# Allegro board production_board1_rev4.brd
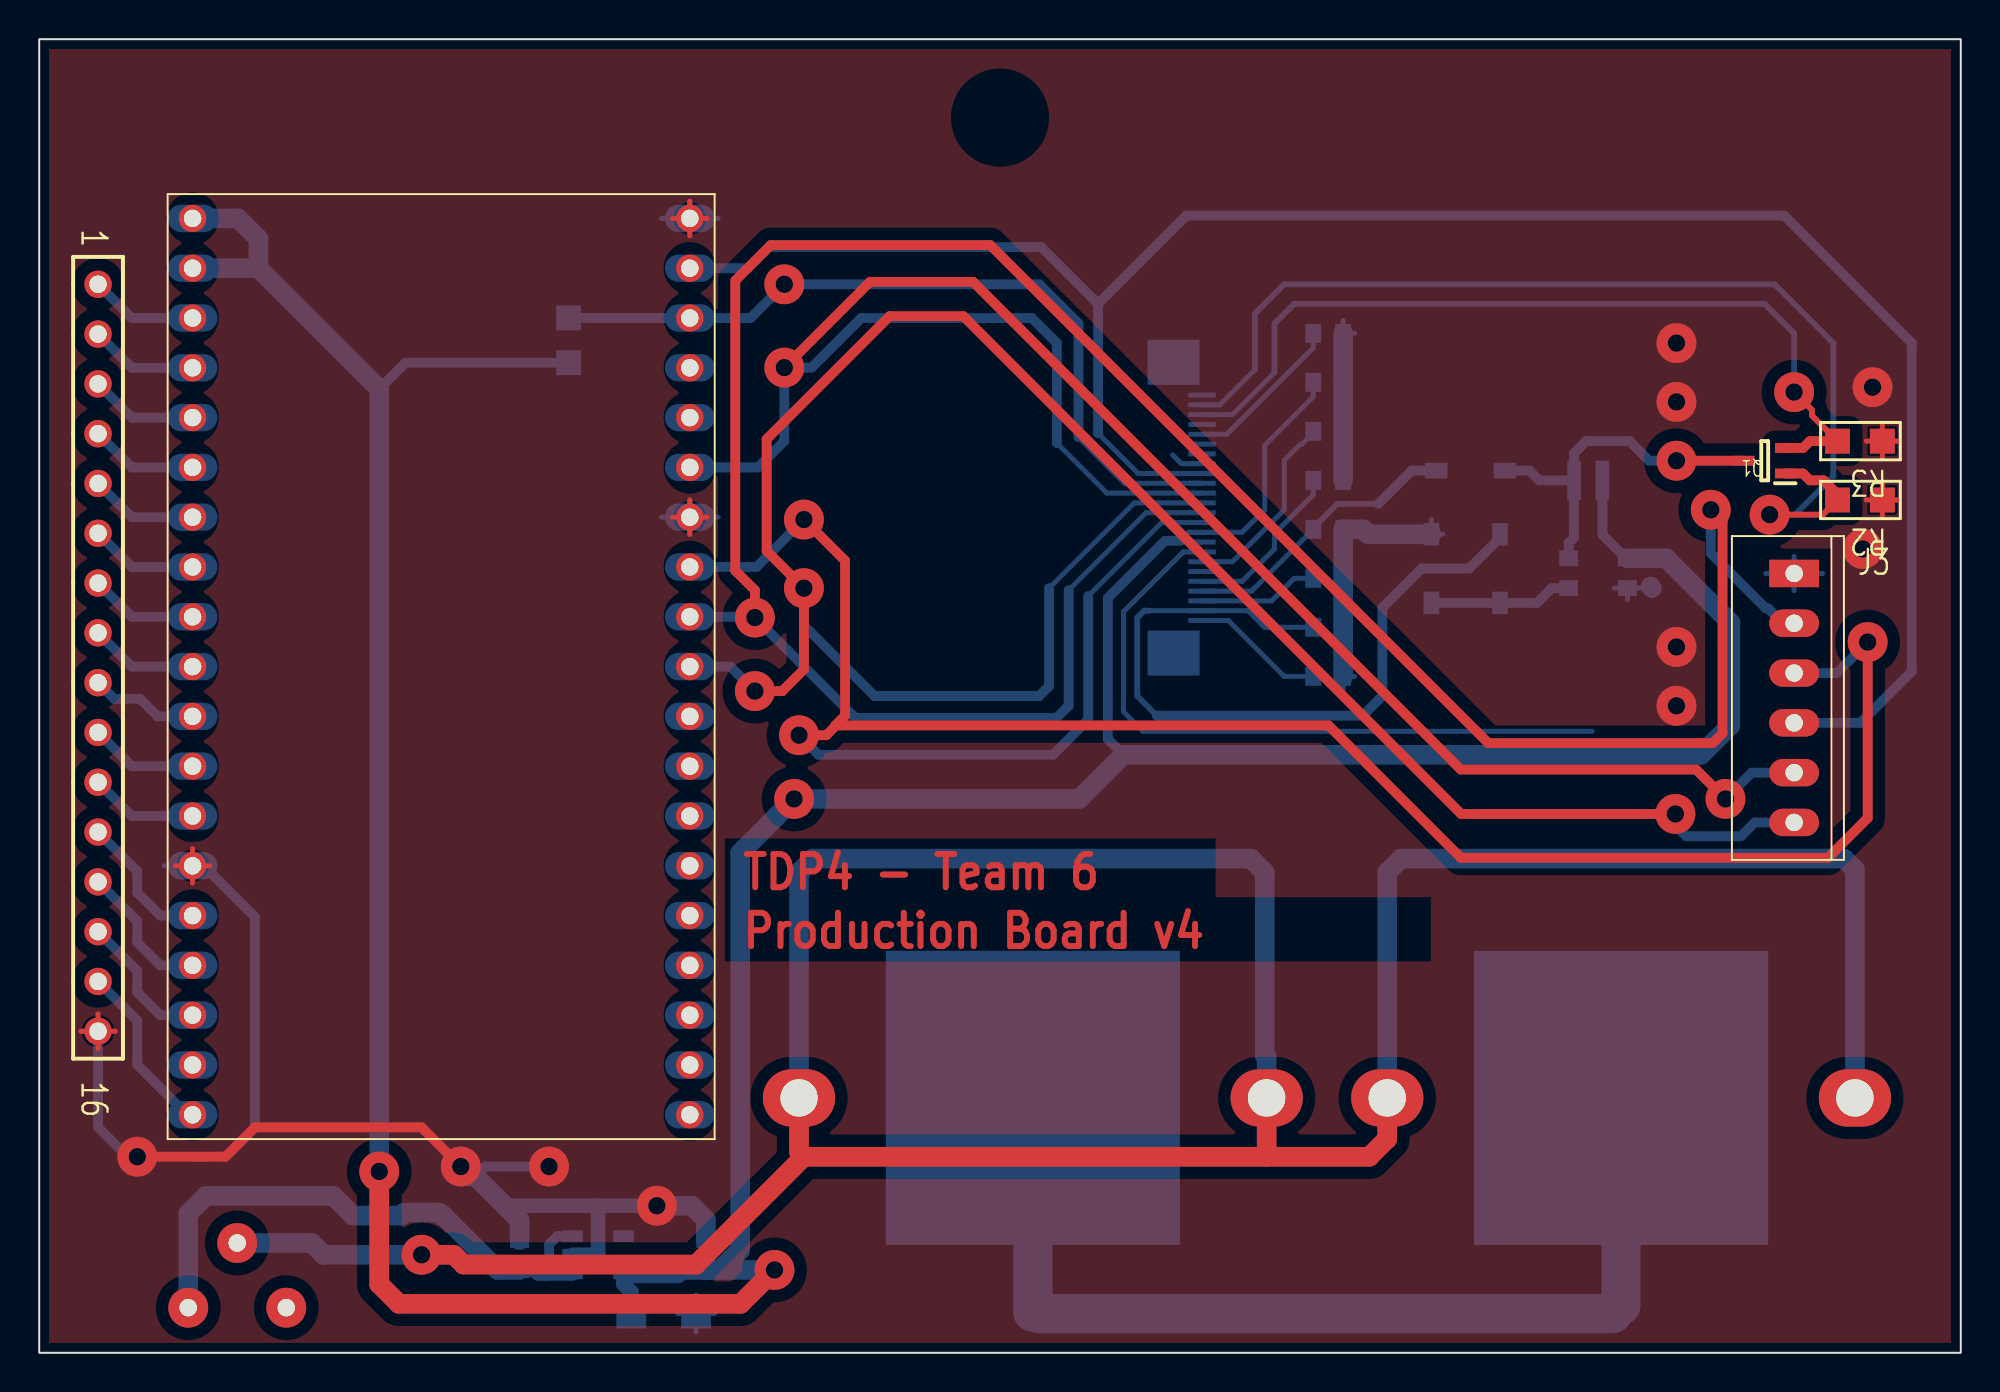
[diagram p0: board, top side]
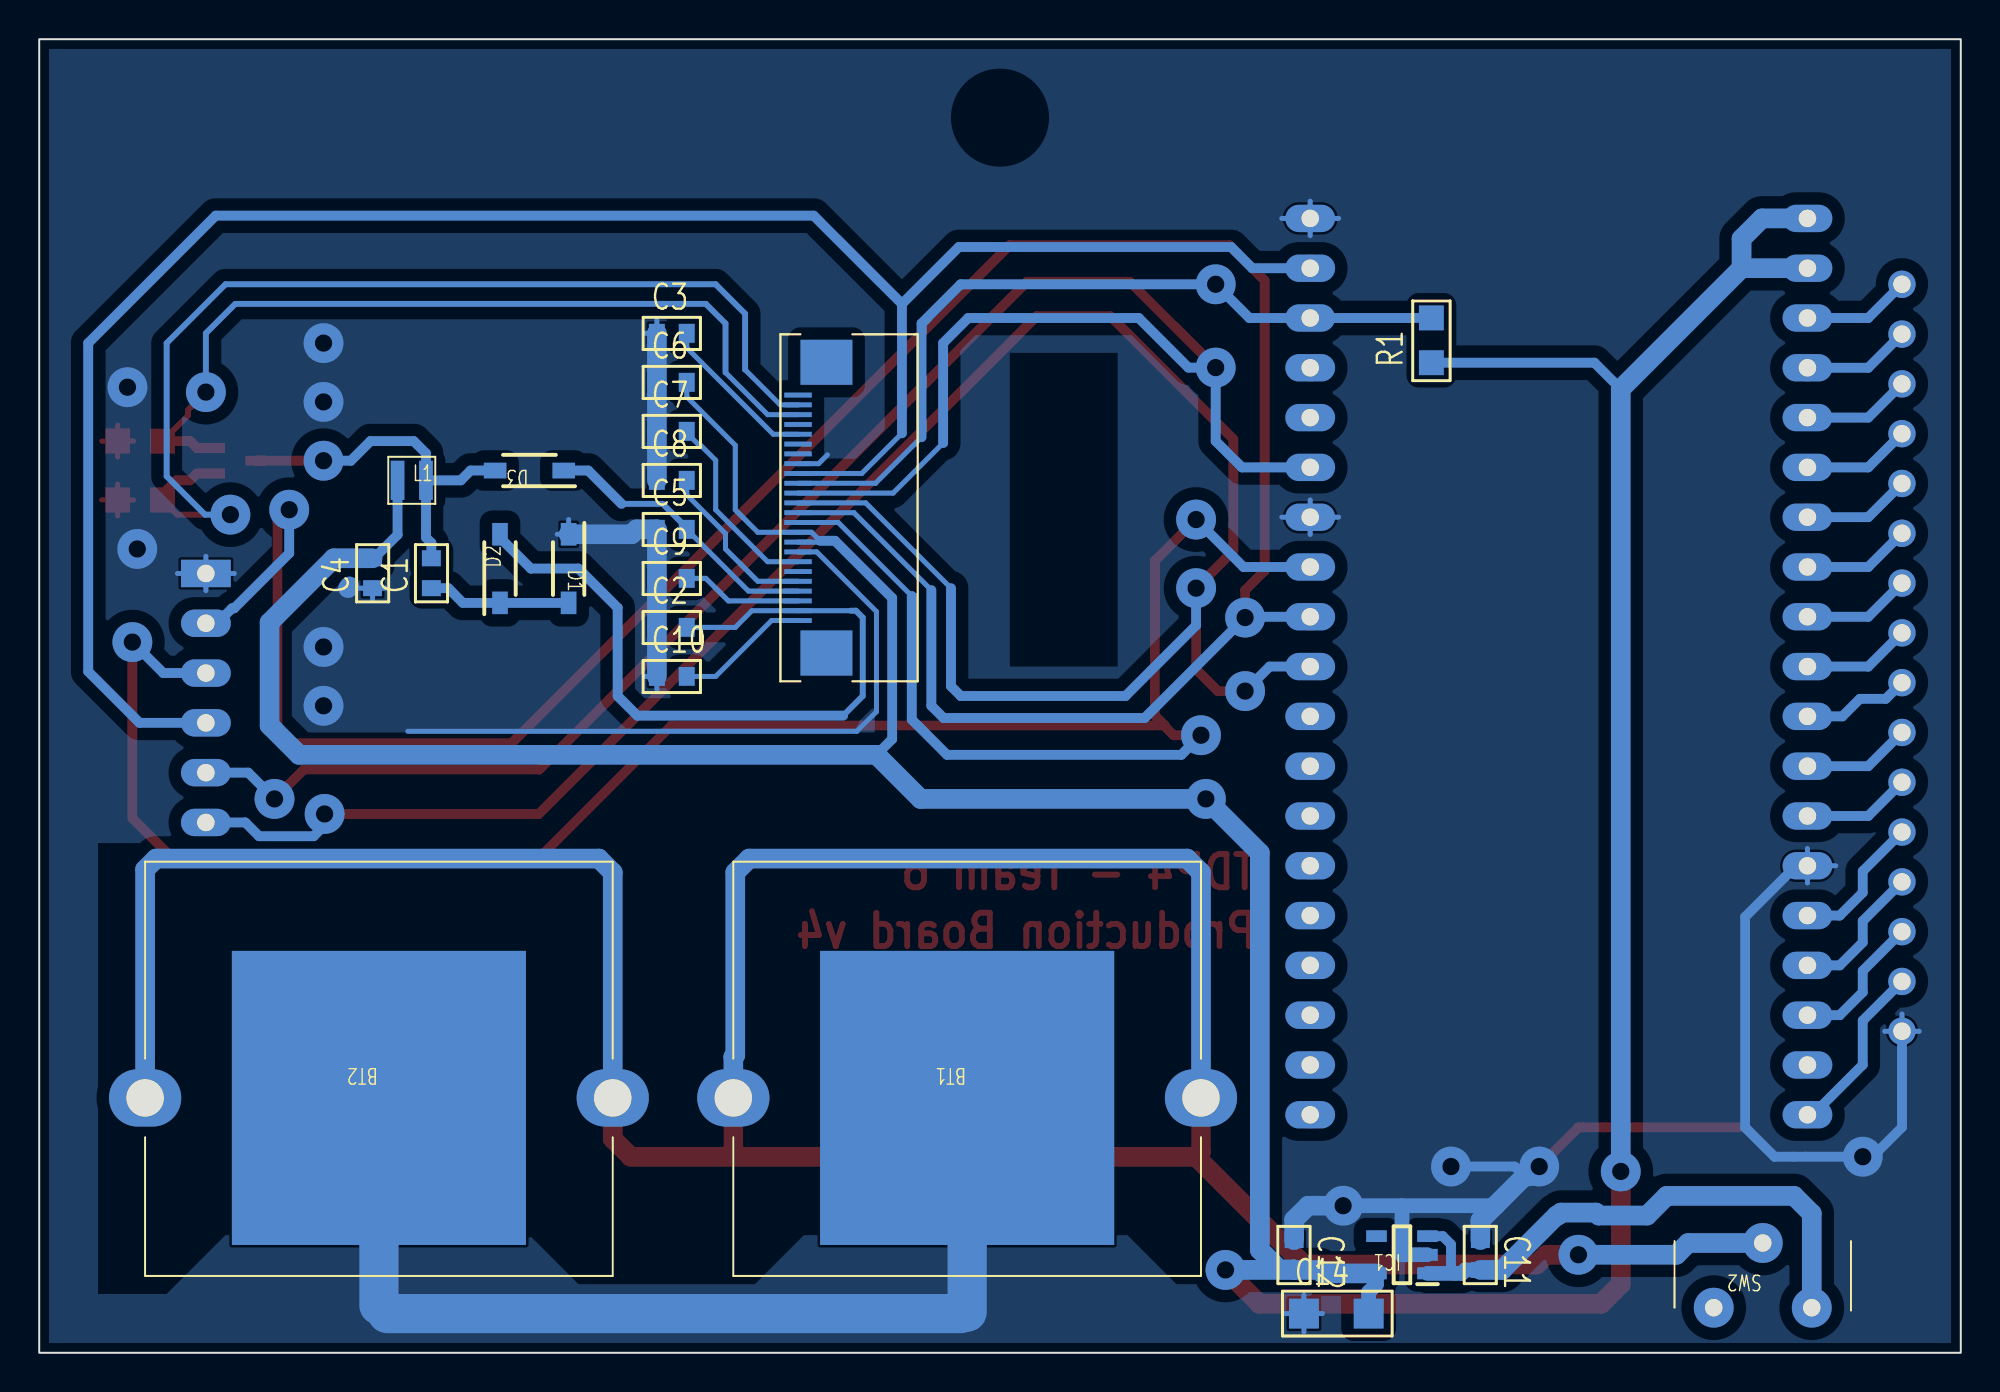
[diagram p1: board, bottom side, seen from below]

Outline 98 x 67 mm; copper layers: TOP, BOTTOM. Coordinates in mm from the lower left corner of the outline.
Outline path: rectangle 0,0 98,67

## Design rules (mm)
constraint set DEFAULT: min track width 0.254

## Placement (name value [footprint] x y rotation side)
BT1  Battery_Holder  [30212]  38.75 13 0 bottom
BT2  Battery_Holder  [30212]  68.75 13 0 bottom
C1  1u  [GU-C0603]  78 39 90 bottom
C2  1u / 50V  [GU-C0603]  66.5 37 180 bottom
C3  1u / 25V  [GU-C0603]  66.5 52 180 bottom
C4  4.7u  [GU-C0603]  81 39 90 bottom
C5  1u / 50V  [GU-C0603]  66.5 42 180 bottom
C6  1u / 25V  [GU-C0603]  66.5 49.5 180 bottom
C7  1u / 25V  [GU-C0603]  66.5 47 180 bottom
C8  1u / 25V  [GU-C0603]  66.5 44.5 180 bottom
C9  1u / 25V  [GU-C0603]  66.5 39.5 180 bottom
C10  1u / 25V  [GU-C0603]  66.5 34.5 180 bottom
C11  1u  [GU-C0603]  24.5 5.75 270 bottom
C12  1u  [GU-C0603]  34 5.75 270 bottom
C14  NOT MOUNTED  [GU-C1206]  33.5 2 180 bottom
D1  MBR0530T1  [SOD3716X135N]  71 40 270 bottom
D2  MBR0530T1  [SOD3716X135N]  74.5 40 90 bottom
D3  MBR0530T1  [SOD3716X135N]  73 45 0 bottom
IC1  AP2127K-3.3TRG1  [SOT95P280X100-5N]  28.5 5 0 bottom
J1  SFV24R-4STE1HLF  [AMPHENOL_SFV24R-4STE1HLF]  53.2 34.25 90 bottom
J3  SPI TP  [GU-MOLEX6]  89.5 39.75 0 top
J4  CON16  [BLKCON100VHTM1SQSW10016]  3 54.5 270 top
L1  10uH  [NRH2412T2R2MNGH]  79 44.5 180 bottom
Q1  SI1308EDL-T1-BE3  [SOT65P210X110-3N]  88 45.5 180 top
R1  100k  [GU-R0805]  27 50.5 90 bottom
R2  10k  [GU-R0805]  94 43.5 180 top
R3  3R  [GU-R0805]  94 46.5 180 top
SW2  -  [SSSS213100]  12.6 2.3 0 bottom
U1  ESP32-DevKitC  [ESP32-DEVKITC]  20.5 35 0 top

## Library data of the parts
BT1 BT2 = Battery_Holder_9
C1-C12 C14 = C
D1-D3 = MBR0530T1
IC1 = AP2127K-3_0.3TRG1
J1 = SFV24R-4STE1HLF_0
J3 = CON6
J4 = CON16
L1 = L
Q1 = SI1308EDL-T1-BE3
R1-R3 = R
SW2 = SSSS213100
U1 = ESP32-DevKitC

## Footprints (pads in the part's own frame, mm; a bottom-side part is the same pattern mirrored in y, then rotated)
30212
  oval 3.683x2.921 hole 1.905: 1(0,0) 2(23.85,0)
  rect 15x15 smd: NP1(11.925,0)
AMPHENOL_SFV24R-4STE1HLF
  rect 2.3x2.65 smd: (1.44,4.65) (16.27,4.65)
  rect 0.25x1.4 smd: 1(3.1,6.1) 2(3.6,6.1) 3(4.1,6.1) 4(4.6,6.1) 5(5.1,6.1) 6(5.6,6.1) 7(6.1,6.1) 8(6.6,6.1) 9(7.1,6.1) 10(7.6,6.1) 11(8.1,6.1) 12(8.6,6.1) 13(9.1,6.1) 14(9.6,6.1) 15(10.1,6.1) 16(10.6,6.1) 17(11.1,6.1) 18(11.6,6.1) 19(12.1,6.1) 20(12.6,6.1) 21(13.1,6.1) 22(13.6,6.1) 23(14.1,6.1) 24(14.6,6.1)
BLKCON100VHTM1SQSW10016
  round 1.397 hole 0.889: 1(0,0) 2(2.54,0) 3(5.08,0) 4(7.62,0) 5(10.16,0) 6(12.7,0) 7(15.24,0) 8(17.78,0) 9(20.32,0) 10(22.86,0) 11(25.4,0) 12(27.94,0) 13(30.48,0) 14(33.02,0) 15(35.56,0) 16(38.1,0)
ESP32-DEVKITC
  round 1.397 hole 0.889: 1(-12.68,22.86) 2(-12.68,20.32) 3(-12.68,17.78) 4(-12.68,15.24) 5(-12.68,12.7) 6(-12.68,10.16) 7(-12.68,7.62) 8(-12.68,5.08) 9(-12.68,2.54) 10(-12.68,0) 11(-12.68,-2.54) 12(-12.68,-5.08) 13(-12.68,-7.62) 14(-12.68,-10.16) 15(-12.68,-12.7) 16(-12.68,-15.24) 17(-12.68,-17.78) 18(-12.68,-20.32) 19(-12.68,-22.86) 20(12.68,-22.86) 21(12.68,-20.32) 22(12.68,-17.78) 23(12.68,-15.24) 24(12.68,-12.7) 25(12.68,-10.16) 26(12.68,-7.62) 27(12.68,-5.08) 28(12.68,-2.54) 29(12.68,0) 30(12.68,2.54) 31(12.68,5.08) 32(12.68,7.62) 33(12.68,10.16) 34(12.68,12.7) 35(12.68,15.24) 36(12.68,17.78) 37(12.68,20.32) 38(12.68,22.86)
GU-C0603
  rect 0.813x0.965 smd: 1(0,0) 2(1.524,0)
GU-C1206
  rect 1.524x1.524 smd: 1(0,0) 2(3.302,0)
GU-MOLEX6
  rect 2.54x1.397 hole 0.889: 1(0,0)
  oval 2.54x1.397 hole 0.889: 2(0,-2.54) 3(0,-5.08) 4(0,-7.62) 5(0,-10.16) 6(0,-12.7)
GU-R0805
  rect 1.27x1.27 smd: 1(0,0) 2(2.286,0)
NRH2412T2R2MNGH
  rect 0.7x2 smd: 1(-0.725,0) 2(0.725,0)
SOD3716X135N
  rect 1.15x0.8 smd: 1(-1.75,0) 2(1.75,0)
SOT65P210X110-3N
  rect 1.05x0.5 smd: 1(-1.05,0.65) 2(-1.05,-0.65) 3(1.05,0)
SOT95P280X100-5N
  rect 1.05x0.6 smd: 1(-1.3,0.95) 2(-1.3,0) 3(-1.3,-0.95) 4(1.3,-0.95) 5(1.3,0.95)
SSSS213100
  round 2.032 hole 0.889: 1(0,0) 2(-2.5,-3.3) 3(-5,0)

## Nets
3V3: C4.2 C6.2 C12.2 C14.2 IC1.5(VOUT) J1.9 J1.10 L1.1 R1.1 U1.1 U1.2
GND: BT1.NP1 BT2.NP1 C2.1 C3.1 C4.1 C5.1 C6.1 C7.1 C8.1 C9.1 C10.1 C11.1 C12.1 C14.1 D1.1(C) IC1.2 J1.8 J1.17 J3.1 J4.16 R2.1 R3.1 U1.14 U1.32 U1.38
VCC: C11.2 IC1.1 IC1.3 SW2.3(NO)
BATT: BT1.1 BT1.2 BT2.1 BT2.2 SW2.2
BUSY: J1.16 J3.4 U1.37
DC: J1.14 J3.5 U1.33
E-INK_CS: J1.13 J3.6 U1.29
GDR: J1.23 Q1.1 R2.2
RESE: J1.22 Q1.2(S) R3.2
RESET: J1.15 R1.2 U1.36
SCL: J1.12 J3.2 U1.30
SDA: J1.11 J3.3 U1.31
VGH: C5.2 D3.1(C) J1.4
VGL: C2.2 D2.2 J1.2
N09940: C1.2 D3.2 L1.2 Q1.3
N26254: C1.1 D1.2 D2.1(C)
N26834: C10.2 J1.1
N27155: C9.2 J1.3
N27189: C8.2 J1.5
N27231: C7.2 J1.7
N27307: C3.2 J1.20
N92405: J4.1 U1.3
N92409: J4.2 U1.4(IO-39)
N92413: J4.3 U1.5
N92417: J4.4 U1.6
N92421: J4.5 U1.7
N92425: J4.6 U1.8
N92429: J4.7 U1.9
N92433: J4.8 U1.10
N92437: J4.9 U1.11
N92441: J4.10 U1.12
N92445: J4.11 U1.13
N92449: J4.15 U1.19
N92511: J4.14 U1.17
N92523: J4.13 U1.16
N92729: J4.12 U1.15

Pads without a net: IC1 4; J1 6 18 19 21 24; SW2 1; U1 18 20 21 22 23 24 25 26 27 28 34 35

## Via types
v1: diameter 2.032, hole 0.889, TOP to BOTTOM, 28 vias

## Routing (per net, layer and track width the routed paths; a pad name or vN(x,y) marks a point on that pad's centre or on a via; arc(x,y) is an arc through that point)
3V3: length 223.4
  TOP w1: v1(37.5,4.23) 35.77,2.5 18.34,2.5 17.34,3.5 v1(17.34,9.25)
  BOTTOM w0.254: C6.2 64.98,48.76 62.5,46.29 62.5,43 61.35,41.85 J1.10 58.61,41.85 58.18,41.42 58.24,41.35 J1.9
  BOTTOM w0.5: R1.1 18.68,50.5 17.34,49.16 ; 58.18,41.42 57.42,41.42 54.5,38.5 54.5,31.3 55.3,30.5 ; L1.1 79.72,41.72 80.92,40.52 C4.2
  BOTTOM w0.75: IC1.5 29.8,3.5 30.2,3.1 C14.2
  BOTTOM w1: v1(17.34,9.25) 17.34,49.16 11.18,55.32 ; IC1.5 32.55,4.05 32.73,4.23 C12.2 ; 11.18,55.32 11.18,56.82 10.14,57.86 U1.1 ; 11.18,55.32 U1.2 ; C4.2 82.98,40.52 86.25,37.25 86.25,32 84.75,30.5 55.3,30.5 53.05,28.25 v1(38.5,28.25) 35.75,25.5 35.75,5.25 34.75,4.25 34.02,4.25 C12.2 ; v1(37.5,4.23) C12.2
GND: length 229.3
  TOP w0.254: 93.19,46.5 R3.1 ; R3.1 94.81,46.5 ; R3.1 94,45.69 ; R3.1 94,47.31 ; U1.32 33.18,43.5 ; U1.32 34.06,42.62 ; U1.32 33.18,41.74 ; U1.32 32.3,42.62 ; 33.18,56.98 U1.38 ; U1.38 33.18,58.74 ; U1.38 32.3,57.86 ; U1.38 34.06,57.86 ; R2.1 94.81,43.5 ; R2.1 94,42.69 ; R2.1 93.19,43.5 ; R2.1 94,44.31 ; U1.14 7.82,25.72 ; U1.14 6.94,24.84 ; U1.14 7.82,23.96 ; U1.14 8.7,24.84 ; J4.16 3,17.28 ; J4.16 3.88,16.4 ; J4.16 3,15.52 ; J4.16 2.12,16.4
  TOP w0.5: v1(21.5,9.5) 19.5,11.5 11,11.5 9.5,10 v1(5,10)
  BOTTOM w0.254: 88.05,39.75 J3.1 ; J3.1 89.5,38.87 ; J3.1 89.5,40.63 ; J3.1 90.95,39.75 ; 71.58,41.75 D1.1 71,42.5 ; U1.38 33.18,58.74 ; U1.38 31.73,57.86 ; U1.38 33.18,56.98 ; U1.38 34.63,57.86 ; 7.82,23.96 U1.14 ; U1.14 7.82,25.72 ; U1.14 6.37,24.84 ; 50.75,2 50.67,2 50.67,2.08 50.75,2 ; 50.75,2 51,2 ; 33.5,1.06 C14.1 ; C14.1 34.44,2 ; C14.1 33.5,2.94 ; C14.1 32.56,2 ; 31.73,42.62 U1.32 ; U1.32 33.18,43.5 ; U1.32 33.18,41.74 ; U1.32 34.63,42.62 ; C4.1 81.66,39 ; C4.1 80.34,39 ; C4.1 81,38.42 ; 66.5,52.66 C3.1 67.08,52 ; 57.8,45.8 58.25,45.35 J1.17 ; 79.2,31.7 56.3,31.7 55.3,32.7 55.3,37.8 58.35,40.85 J1.8 ; J4.16 3,17.28 ; J4.16 2.12,16.4 ; J4.16 3.88,16.4 ; 67.08,34.5 C10.1 66.5,33.84 ; 80.67,2.42 80.25,2
  BOTTOM w0.5: U1.14 8.39,24.84 11,22.23 11,11.5 9.5,10 v1(5,10) 4.5,10 3,11.5 J4.16 ; v1(26,9.5) 22.75,9.5 22.25,9
  BOTTOM w0.75: IC1.2 28.5,5 28.5,7.5 ; 28.5,7.5 v1(31.5,7.5) ; 28.5,7.5 23.75,7.5
  BOTTOM w1: D1.1 67.78,41.75 67.53,42 C5.1 C9.1 C2.1 C10.1 ; C11.1 24.5,6.75 22.25,9 22,9 v1(21.5,9.5) ; 82.25,39 82.18,39.09 ; C8.1 C7.1 C6.1 C3.1 ; C12.1 34,6.78 33.28,7.5 v1(31.5,7.5)
  BOTTOM w2: 80.25,2 51,2 ; BT1.NP1 50.67,2.08 ; BT2.NP1 80.67,2.42
  vias: v1(83.5,51.5) v1(83.5,48.5) v1(83.5,36) v1(83.5,33) v1(93,41) v1(93.5,49.25)
VCC: length 29.5
  BOTTOM w0.5: IC1.3 26.42,5.95 26,5.53 26,4.25 25.8,4.05
  BOTTOM w0.75: C11.2 25.27,4.23 25.45,4.05 IC1.1
  BOTTOM w1: C11.2 23.39,4.23 20.62,7 20.54,7 20.39,7.15 18.61,7.15 18.46,7 16,7 15,8 8.5,8 7.6,7.1 SW2.3
BATT: length 164.9
  TOP w1: BT2.1 68.75,10.91 67.84,10 62.6,10 ; 39,10 33.5,4.5 21.64,4.5 21.14,5 v1(19.5,5) ; 39,10 38.75,10.25 BT1.1 ; 39,10 62.6,10 ; BT1.2 62.6,10
  BOTTOM w1: BT2.1 68.75,24.5 69.46,25.21 92.04,25.21 92.6,24.65 BT2.2 ; SW2.2 13.9,5.6 14.5,5 v1(19.5,5) ; BT1.1 38.75,24.5 39.46,25.21 61.79,25.21 62.5,24.5 62.5,15.19 62.6,15.09 BT1.2
BUSY: length 105.1
  BOTTOM w0.254: 54,46.9 56.05,44.85 J1.16
  BOTTOM w0.5: U1.37 36.13,55.32 37.21,56.4 51.1,56.4 54,53.5 ; J3.4 92.88,32.13 95.5,34.75 95.5,51.5 89,58 58.5,58 54,53.5 ; 54,53.5 54,46.9
DC: length 103
  TOP w0.5: v1(38,50.25) 42.38,54.63 47.62,54.63 72.5,29.75 84.5,29.75 v1(86,28.25)
  BOTTOM w0.254: J1.14 54.45,43.85 51.9,46.4
  BOTTOM w0.5: U1.33 36.66,45.16 38,46.5 v1(38,50.25) 39.39,50.25 41.92,52.78 50.62,52.78 51.9,51.5 51.9,46.4 ; J3.5 87.34,29.59 v1(86,28.25)
E-INK_CS: length 116.6
  TOP w0.5: v1(83.45,27.48) 72.52,27.48 47.12,52.88 43.38,52.88 37.1,46.6 37.1,40.9 v1(39,39) 39,34.86 37.89,33.75 v1(36.5,33.75)
  BOTTOM w0.254: J1.13 55.85,43.35 51.5,39
  BOTTOM w0.5: v1(39,39) 39,37.1 42.6,33.5 51,33.5 51.5,34 51.5,39 ; U1.29 35.25,35 v1(36.5,33.75) ; v1(83.45,27.48) 83.5,27.43 83.5,26.85 84,26.35 86.79,26.35 87.49,27.05 J3.6
GDR: length 55.7
  TOP w0.3: v1(88.25,42.75) 90.96,42.75 R2.2
  TOP w0.5: Q1.1 89.95,44.85 90.3,44.5 91,44.5 91.71,43.79 R2.2
  BOTTOM w0.254: 62,50.14 60.21,48.35 J1.23
  BOTTOM w0.3: v1(88.25,42.75) 89.54,42.75 91.5,44.71 91.5,51.5 88.5,54.5 63.5,54.5 62,53 62,50.14
Net_18: length 0
RESE: length 43.9
  TOP w0.3: R3.2 90.41,47.8 90.41,48.09 v1(89.5,49)
  TOP w0.5: Q1.2 89.95,46.15 90.3,46.5 R3.2
  BOTTOM w0.254: 63,50 60.85,47.85 J1.22
  BOTTOM w0.3: v1(89.5,49) 89.5,52 88,53.5 64,53.5 63,52.5 63,50
RESET: length 40.6
  BOTTOM w0.254: J1.15 55.35,44.35 53,46.7
  BOTTOM w0.5: 53,46.7 53,52.5 51,54.5 v1(38,54.5) 36.28,52.78 U1.36 28.1,52.78 28.09,52.79 R1.2
SCL: length 135.1
  TOP w0.5: v1(36.5,37.5) 36.5,38.89 35.5,39.89 35.5,54.69 37.31,56.5 48.5,56.5 73.9,31.1 85.35,31.1 85.85,31.6 85.85,42.4 v1(85.25,43)
  BOTTOM w0.254: J1.12 56.45,42.85 52.5,38.9
  BOTTOM w0.5: 52.5,38.9 52.5,33 51.88,32.38 41.62,32.38 v1(36.5,37.5) 36.46,37.54 U1.30 ; J3.2 88.93,37.21 88.17,37.97 88.06,37.97 85.25,40.78 v1(85.25,43)
SDA: length 119.7
  TOP w0.5: 40.6,31.96 40.6,32 41.1,32.5 41.1,40.4 v1(39,42.5) ; 40.6,31.96 40.64,32 65.75,32 72.5,25.25 91.23,25.25 93.25,27.27 v1(93.25,36.25) ; 40.6,31.96 40.14,31.5 v1(38.75,31.5)
  BOTTOM w0.254: J1.11 57.25,42.35 53.5,38.6
  BOTTOM w0.5: v1(39,42.5) 36.58,40.08 U1.31 ; v1(38.75,31.5) 39.75,30.5 51.7,30.5 53.5,32.3 53.5,38.6 ; v1(93.25,36.25) 91.67,34.67 J3.3
VGH: length 14.5
  BOTTOM w0.254: C5.2 61.83,38.85 J1.4
  BOTTOM w0.3: C5.2 64.98,42.08 66.2,43.3 68.3,43.3
  BOTTOM w0.5: D3.1 70,45 68.3,43.3
VGL: length 39
  BOTTOM w0.254: 56.6,37.85 J1.2 61.65,37.85 62.5,37 C2.2
  BOTTOM w0.3: 57,32.5 56,33.5 56,37.5 56.35,37.85 56.6,37.85
  BOTTOM w0.5: D2.2 74.5,41.58 72.92,40 70.5,40 68.5,38 68.5,33.5 67.5,32.5 57,32.5
N09940: length 18.5
  TOP w0.5: Q1.3 v1(83.5,45.5)
  BOTTOM w0.5: D3.2 76,45 76.5,44.5 L1.2 ; v1(83.5,45.5) 82.11,45.5 81.11,46.5 78.9,46.5 78.28,45.88 L1.2 ; L1.2 78.28,41.58 78,41.31 C1.2
N26254: length 7.3
  BOTTOM w0.5: C1.1 77.14,39 76.39,38.25 D2.1 D1.2
N26834: length 6.9
  BOTTOM w0.254: C10.2 63.5,34.5 60.65,37.35 J1.1
N27155: length 6.2
  BOTTOM w0.254: J1.3 62.85,38.35 64,39.5 C9.2
N27189: length 8.7
  BOTTOM w0.254: J1.5 61.35,39.35 63,41 63,41.79 64.98,43.76 C8.2
N27231: length 10
  BOTTOM w0.254: J1.7 60.85,40.35 63.5,43 63.5,45.52 64.31,46.34 64.39,46.34 64.98,46.92 C7.2
N27307: length 8.2
  BOTTOM w0.254: J1.20 60.56,46.85 64.98,51.26 C3.2
N92405: length 5.5
  BOTTOM w0.5: J4.1 4.72,52.78 U1.3
N92409: length 5.5
  BOTTOM w0.5: U1.4 4.72,50.24 J4.2
N92413: length 5.5
  BOTTOM w0.5: U1.5 4.72,47.7 J4.3
N92417: length 5.5
  BOTTOM w0.5: J4.4 4.72,45.16 U1.6
N92421: length 5.5
  BOTTOM w0.5: J4.5 4.72,42.62 U1.7
N92425: length 5.5
  BOTTOM w0.5: J4.6 4.72,40.08 U1.8
N92429: length 5.5
  BOTTOM w0.5: U1.9 4.72,37.54 J4.7
N92433: length 5.5
  BOTTOM w0.5: U1.10 4.72,35 J4.8
N92437: length 5.5
  BOTTOM w0.5: U1.11 6.04,32.46 5.14,33.36 3.82,33.36 J4.9
N92441: length 5.5
  BOTTOM w0.5: J4.10 4.72,29.92 U1.12
N92445: length 5.5
  BOTTOM w0.5: U1.13 4.72,27.38 J4.11
N92449: length 9
  BOTTOM w0.5: U1.19 7.55,12.14 5,14.69 5,16.94 J4.15
N92511: length 7.2
  BOTTOM w0.5: U1.17 6.17,17.22 5,18.39 5,19.48 J4.14
N92523: length 7.2
  BOTTOM w0.5: J4.13 5,22.02 5,20.93 6.17,19.76 U1.16
N92729: length 7.2
  BOTTOM w0.5: U1.15 6.17,22.3 5,23.47 5,24.56 J4.12

## Copper pours and planes (outline as drawn; the poured copper is in the pictures)
GND on TOP: 0.5,66.5 0.5,0.5 97.5,0.5 97.5,66.5
GND on BOTTOM: 0.5,66.5 0.5,0.5 97.5,0.5 97.5,66.5 ; 1 cut-out

## Text on the board
TOP: TDP4 - Team 6 | Production Board v4
